# Altium PCB Main_Board.PcbDoc (part 12 of 14)
Units mm, origin at the board's own origin, x right, y up, seen from the top; angles counter-clockwise.
Board outline 142 x 82 mm, 10 copper layers (L1_Top, L2_PWR1, L3_Sig1, L4_GND1, L5_Sig2, L6_Sig3, L7_GND2, L8_Sig4, L9_GND3, L8_Bottom), stack 1.71 mm thick; 299 components, 328 nets, 2329 pads, 2908 vias.
Unrouted connection lines stored in the file: 2.
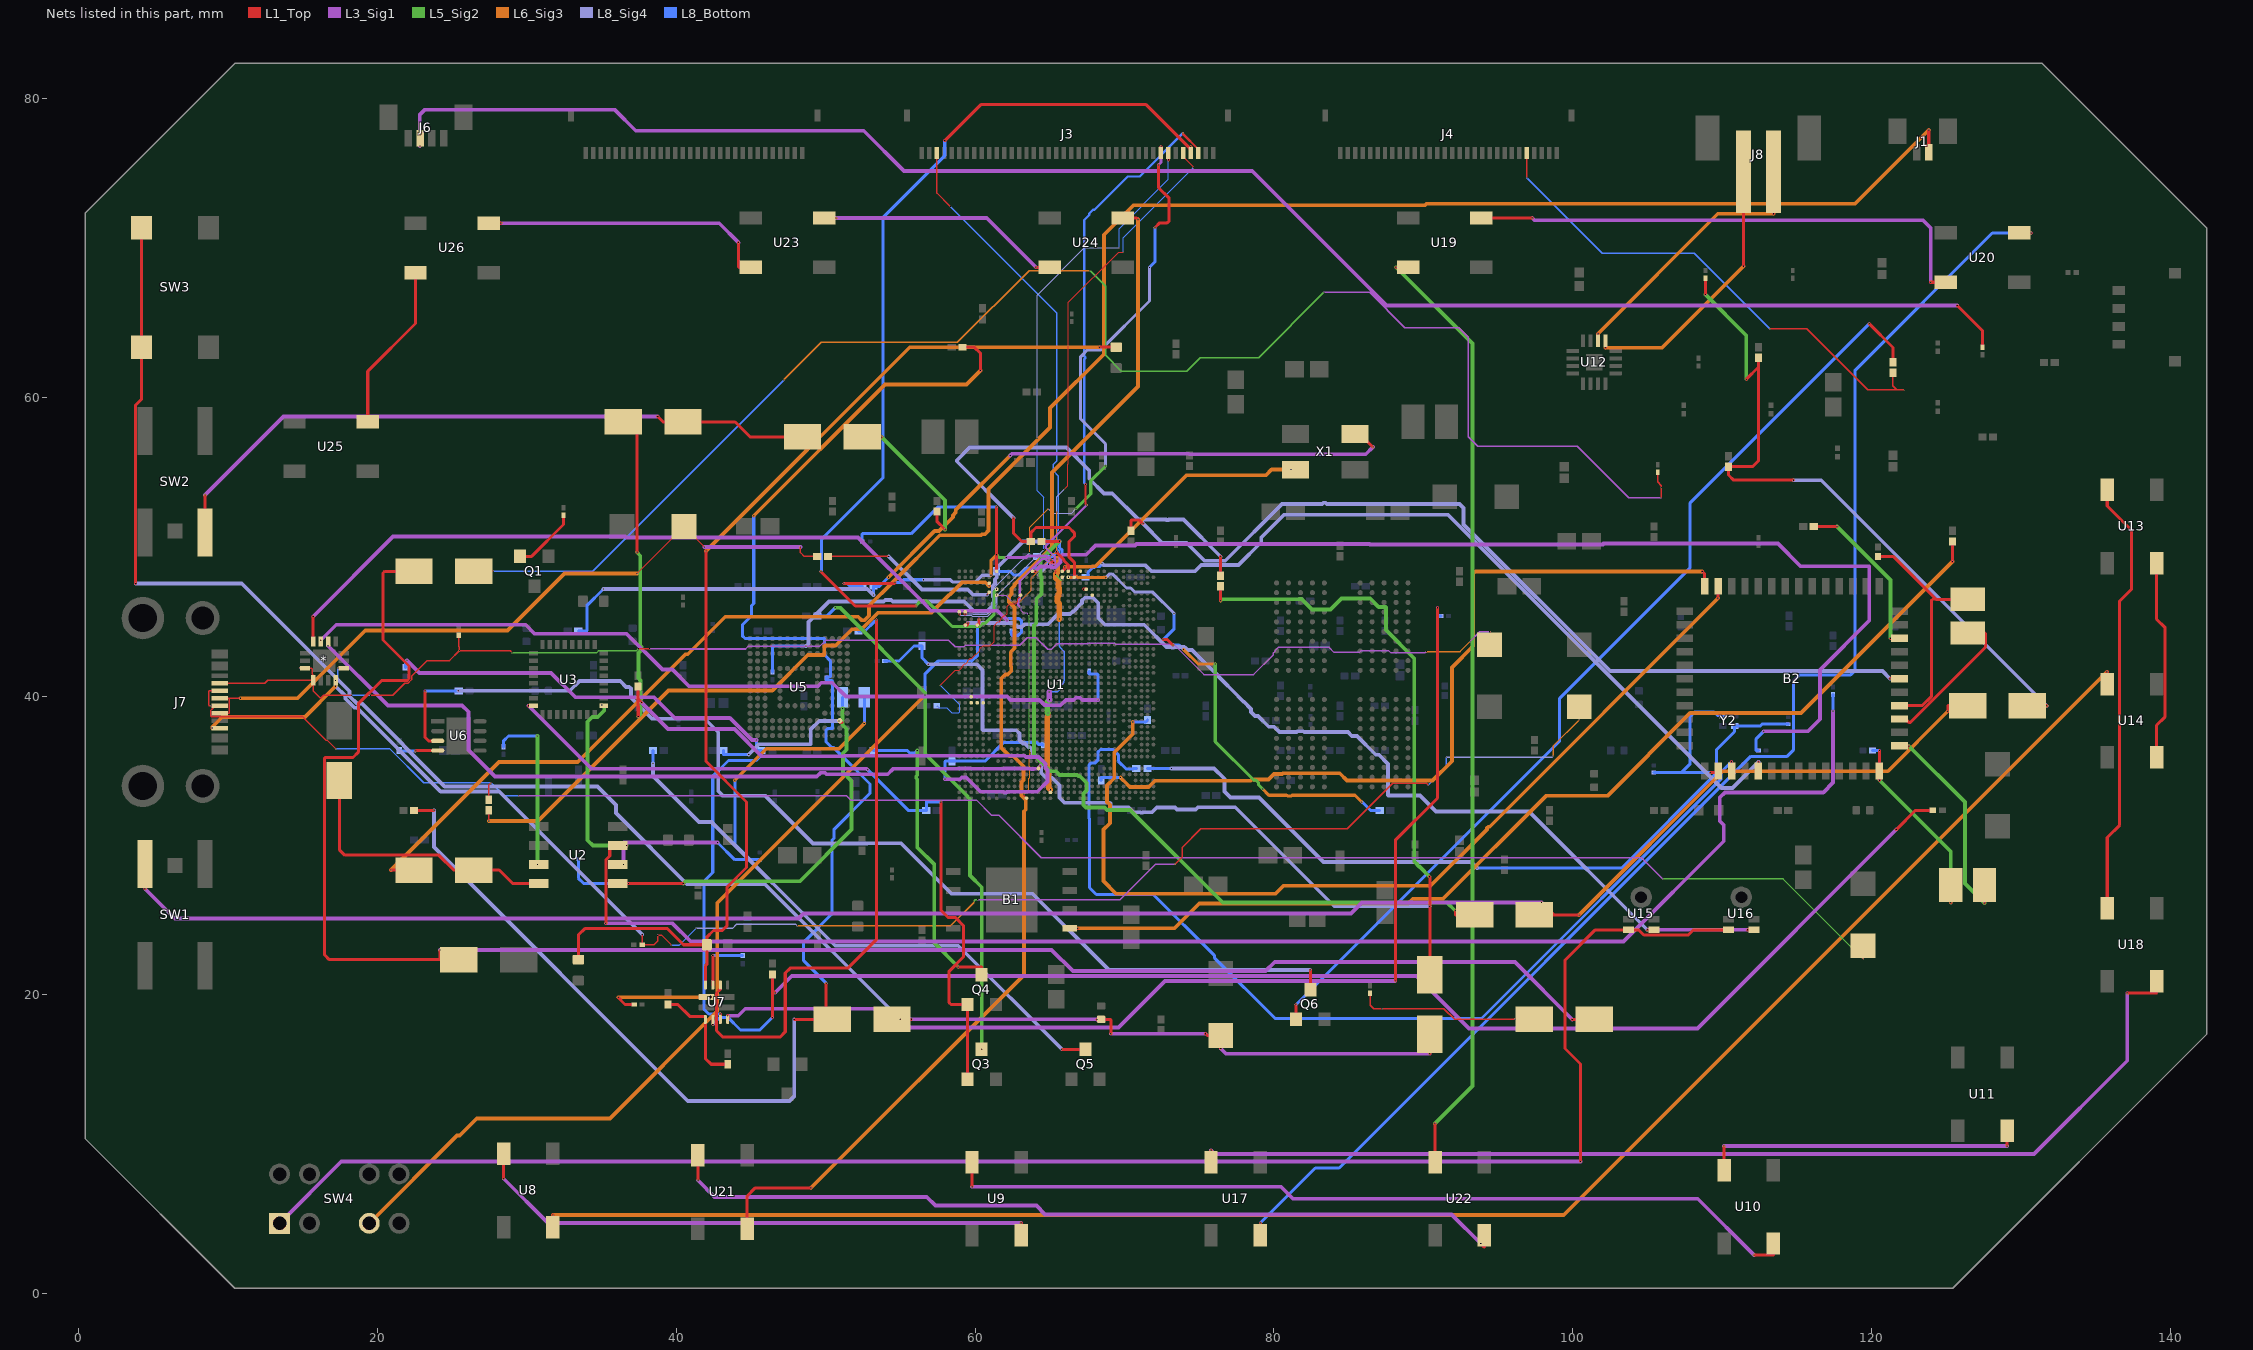
[diagram p19: the nets of this part, all layers, seen from the top]

## Via types
v1: diameter 0.1, hole 0.08, L1_Top to L8_Bottom, 1169 vias
v2: diameter 0.01, hole 0.01, L3_Sig1 to L8_Sig4, 433 vias
v3: diameter 0.01, hole 0.01, L8_Sig4 to L8_Bottom, 375 vias
v4: diameter 0.01, hole 0.01, L1_Top to L3_Sig1, 355 vias
v5: diameter 0.254, hole 0.01, L1_Top to L8_Bottom, 150 vias
v6: diameter 0.01, hole 0.01, L6_Sig3 to L8_Bottom, 129 vias
v7: diameter 0.05, hole 0.04, L1_Top to L8_Bottom, 104 vias
v8: diameter 0.01, hole 0.01, L1_Top to L5_Sig2, 89 vias
v9: diameter 0.01, hole 0.01, L1_Top to L8_Bottom, 41 vias
v10: diameter 0.1, hole 0.08, L1_Top to L3_Sig1, 17 vias
v11: diameter 0.1, hole 0.08, L1_Top to L5_Sig2, 11 vias
v12: diameter 0.1, hole 0.08, L8_Sig4 to L8_Bottom, 10 vias
v13: diameter 0.1, hole 0.08, L6_Sig3 to L8_Bottom, 9 vias
v14: diameter 1.27, hole 0.711, L1_Top to L8_Bottom, 8 vias
v15: diameter 0.4, hole 0.2, L1_Top to L8_Bottom, 4 vias
v16: diameter 0.05, hole 0.08, L1_Top to L8_Bottom, 3 vias
v17: diameter 0.05, hole 0.08, L6_Sig3 to L8_Bottom, 1 vias

## Nets (pads, with @x,y where several pads share a name; then routed paths per layer and width w, separated by ;. In a path a pad name is that pad's centre, name@x,y a point inside that pad or via, vN(x,y) a via of type N, cw(c..) or ccw(c..) an arc to the next point about the centre after c; other vN are vias at no path point) (continued)
MIPI_DSI_D3P: J3.3 U1.AT18 | length 47.8
  L1_Top w0.102: J3.3@57.441,76.349 57.441,73.668 v4(58.344,72.765) ; U1.AT18@65.041,33.549 v1(65.041,33.724)
  L3_Sig1 w0.381: v3(64.967,40.275) 64.967,39.77 v8(64.987,39.75)
  L5_Sig2 w0.381: v2(64.869,38.864) 64.84,38.894 64.84,39.603 v8(64.987,39.75)
  L6_Sig3 w0.381: v2(64.869,38.864) 64.869,38.602 64.826,38.558 64.826,36.564 64.834,36.556 64.834,35.078 64.931,34.981 64.931,33.834 v1(65.041,33.724) ; v6(65.491,49.168) 65.509,49.149 65.509,48.262 65.417,48.169 65.417,47.879 65.581,47.715 65.581,47.699 65.607,47.673 65.607,47.508 65.581,47.482 65.581,47.266 65.626,47.221 65.626,46.868 65.581,46.823 65.581,46.703 65.511,46.632 65.511,46.33 65.641,46.199 v6(65.641,45.149)
  L8_Bottom w0.102: v4(58.344,72.765) 65.482,65.627 65.482,55.745 65.248,55.511 65.248,55.061 65.558,54.751 65.558,51.09 65.482,51.014 65.482,49.877 65.631,49.728 65.631,49.585 65.595,49.548 65.595,49.272 v6(65.491,49.168) ; v3(64.967,40.275) 65.511,40.275 65.721,40.484 65.721,40.679 65.943,40.902 65.943,41.002 65.956,41.015 65.956,42.989 65.682,43.263 65.682,43.324 65.641,43.365 v6(65.641,45.149)
  other v2: 64.967,40.275 58.344,72.765
  other v3: 58.344,72.765
Net*_6: *.6 R77.1 | length 57.7
  L1_Top w0.203: *.6@16.191,43.649 v10(16.191,43.731)
  L3_Sig1 w0.254: v10(16.191,43.731) 17.233,44.772 29.917,44.772 30.527,44.163 36.685,44.163 39.078,41.77 39.733,41.77 40.846,40.657 49.475,40.657 49.704,40.886 50.44,40.886 51.355,39.972 62.15,39.972 62.378,39.743 64.301,39.743 64.654,39.391 64.739,39.391 64.749,39.38 65.095,39.38 65.102,39.387 65.725,39.387 66.082,39.743 66.607,39.743 66.75,39.887 67.03,39.887 67.174,39.743 v1(68.22,39.743)
  L8_Bottom w0.203: R77.1@67.641,41.649 67.641,41.47 68.195,41.47 68.22,41.445 v1(68.22,39.743)
Net*_7: *.7 R78.1 | length 55.5
  L1_Top w0.203: *.7@15.691,43.649 v10(15.691,45.331)
  L3_Sig1 w0.254: v10(15.691,45.331) 21.032,50.671 36.571,50.671 36.629,50.613 52.169,50.613 56.458,46.323 56.504,46.323 56.593,46.234 56.593,46.188 57.07,45.712 61.51,45.712 62.128,45.094 v1(62.138,45.094)
  L8_Bottom w0.203: v1(62.138,45.094) 62.223,45.179 62.947,45.179 63.116,45.009 63.116,44.283 62.894,44.061 62.467,44.061 62.441,44.086 R78.1@62.441,44.349
NetB2_13: B2.13 C126.1 Y2.1 | length 12.7
  L1_Top w0.203: v1(109.216,34.866) 109.741,34.866 B2.13@109.741,34.973
  L8_Bottom w0.203: v1(109.216,34.866) 109.19,34.892 107.311,34.892 ; Y2.1@110.041,38.699 109.701,38.699 109.47,38.93 108.174,38.93 107.844,38.6 107.844,35.425 107.311,34.892 ; 107.311,34.892 105.441,34.892 C126.1@105.441,34.874 107.293,34.874 107.311,34.892
NetB2_14: B2.14 R54.2 | length 67.7
  L1_Top w0.203: v1(110.638,35.603) 110.638,35.581 110.641,35.577 B2.14@110.641,34.973
  L8_Bottom w0.203: R54.2@70.791,35.149 70.557,35.149 70.557,35.12 70.112,35.12 69.592,35.641 69.592,36.06 69.236,36.416 68.391,36.416 68.221,36.245 68.221,35.697 68.05,35.527 67.78,35.527 67.615,35.361 67.615,31.831 67.661,31.785 67.661,27.17 68.113,26.719 71.934,26.719 76.012,22.64 76.012,22.486 80.091,18.407 93.899,18.407 109.92,34.428 109.92,34.884 v1(110.638,35.603)
NetB2_16: B2.16 R56.2 | length 56.4
  L1_Top w0.203: B2.16@112.441,34.973 v1(112.441,35.577)
  L8_Sig4 w0.254: v12(68.498,48.862) 68.509,48.862 68.624,48.747 71.409,48.747 71.802,48.354 74.72,48.354 75.144,48.779 77.637,48.779 79.156,50.299 79.156,50.619 80.676,52.138 91.664,52.138 109.965,33.837 110.701,33.837 v1(112.441,35.577)
  L8_Bottom w0.203: R56.2@67.391,47.949 67.441,47.949 67.565,48.073 67.565,48.276 67.886,48.598 67.982,48.598 68.068,48.684 68.347,48.684 68.498,48.834 v12(68.498,48.862)
NetB2_25: B2.25 C130.1 L4.1 | length 13.8
  L1_Top w0.203: v1(120.541,34.361) B2.25@120.541,34.973 v1(120.541,36.349) ; L4.1@125.316,27.349 125.316,26.158 v11(125.319,26.154)
  L5_Sig2 w0.254: v1(120.541,34.361) 125.319,29.583 v11(125.319,26.154)
  L8_Bottom w0.203: C130.1@120.068,36.349 v1(120.541,36.349)
NetB2_26: B2.26 L4.2 | length 14.4
  L1_Top w0.203: B2.26@121.879,36.661 v1(122.5,36.661) ; v1(127.567,26.146) L4.2@127.567,27.349
  L5_Sig2 w0.254: v1(122.5,36.661) 126.259,32.902 126.259,27.454 v1(127.567,26.146)
NetB2_28: B2.28 L5.2 | length 10.1
  L1_Top w0.203: B2.28@121.879,38.461 122.297,38.461 122.539,38.219 122.59,38.219 127.645,43.274 127.645,44.188 127.609,44.224 L5.2@126.441,44.224
NetB2_29: B2.29 C138.1 L5.1 | length 16.3
  L1_Top w0.203: C138.1@120.441,49.349 121.459,49.349 124.308,46.499 ; B2.29@121.879,39.361 123.414,39.361 124.011,39.958 124.011,46.38 124.13,46.499 124.308,46.499 ; L5.1@126.441,46.475 124.353,46.475 124.333,46.475 124.308,46.499
NetB2_31: B2.31 R72.2 | length 60.4
  L1_Top w0.203: R72.2@70.441,51.058 70.441,51.757 70.467,51.783 70.989,51.783 v1(71.232,51.54) ; v1(121.255,41.161) B2.31@121.879,41.161
  L8_Sig4 w0.254: v1(71.232,51.54) 72.513,50.259 74.152,50.259 75.358,49.053 76.743,49.053 80.547,52.857 83.244,52.857 83.328,52.941 83.454,52.941 83.538,52.857 92.431,52.857 92.706,52.583 92.706,51.484 102.517,41.673 120.743,41.673 v1(121.255,41.161)
NetB2_34: B2.34 C132.1 | length 11.1
  L1_Top w0.203: C132.1@116.15,51.349 v1(117.699,51.349) ; v1(121.281,43.861) B2.34@121.879,43.861
  L5_Sig2 w0.254: v1(117.699,51.349) 121.281,47.768 v1(121.281,43.861)
NetB2_49: B2.49 R53.1 | length 63.2
  L1_Top w0.203: v1(109.741,46.542) B2.49@109.741,47.349
  L6_Sig3 w0.254: v13(70.557,38.26) 70.557,37.457 69.318,36.218 69.318,34.491 68.83,34.003 68.83,32.91 69.025,32.715 69.025,31.487 68.595,31.057 68.595,27.608 69.439,26.764 80.107,26.764 80.641,27.297 90.496,27.297 94.269,31.07 94.269,31.162 94.359,31.252 94.451,31.252 v1(109.741,46.542)
  L8_Bottom w0.203: v13(70.557,38.26) 71.418,38.26 71.541,38.384 R53.1@71.541,38.399
NetB2_50: B2.50 R52.1 | length 54.6
  L1_Top w0.203: v1(108.682,48.328) 108.841,48.169 B2.50@108.841,47.349
  L6_Sig3 w0.254: v13(69.744,34.536) 69.744,34.533 70.188,34.089 70.188,34.083 70.366,33.905 71.627,33.905 72.049,34.327 78.439,34.327 78.532,34.42 79.648,34.42 80.001,34.773 80.539,34.773 80.592,34.826 84.411,34.826 84.899,34.339 90.629,34.339 91.918,35.628 91.918,41.909 93.335,43.326 93.335,48.179 93.484,48.328 v1(108.682,48.328)
  L8_Bottom w0.203: R52.1@68.441,34.349 68.441,34.536 v13(69.744,34.536)
NetC9_1: C9.1 R6.1 X1.1 | length 61.7
  L1_Top w0.203: X1.1@85.441,57.549 85.746,57.549 v1(86.635,56.66)
  L3_Sig1 w0.254: v1(62.353,56.101) 62.473,56.22 74.296,56.22 74.334,56.183 86.158,56.183 v1(86.635,56.66)
  L6_Sig3 w0.254: v13(54.199,47.947) 57.293,51.041 57.588,51.041 58.517,51.97 58.517,52.092 58.699,52.274 58.699,52.447 v1(62.353,56.101)
  L8_Sig4 w0.254: v1(35.124,47.16) 52.785,47.16 v1(53.191,46.753)
  L8_Bottom w0.203: C9.1@33.441,44.349 33.981,44.349 34.006,44.375 34.006,46.042 v1(35.124,47.16) ; v1(53.191,46.753) R6.1@53.191,47.349 53.601,47.349 v13(54.199,47.947)
NetC14_1: C14.1 U2.1 Y1.2 | length 31.2
  L1_Top w0.203: U2.1@36.091,27.444 36.097,27.449 v1(36.792,27.449) ; v1@36.792,27.444 36.795,27.444 v11(40.458,27.444)
  L5_Sig2 w0.254: v11(40.458,27.444) 40.616,27.602 48.281,27.602 51.734,31.054 51.734,34.321 51.158,34.896 51.158,36.173 51.388,36.404 51.388,37.804 51.126,38.067 v1(51.126,39.159)
  L8_Bottom w0.203: C14.1@33.441,29.112 33.441,27.805 33.797,27.449 v1(36.792,27.449) ; v1(51.126,39.159) 51.132,39.165 Y1.2@51.132,39.915
NetC15_1: C15.1 U2.2 Y1.1 | length 29.2
  L1_Top w0.203: U2.2@36.091,28.714 v1(36.47,28.714)
  L3_Sig1 w0.254: v1(36.47,28.714) 36.47,30.167 36.496,30.193 v1(42.762,30.193)
  L6_Sig3 w0.254: v1(43.912,34.358) 46.021,36.466 50.88,36.466 v1(52.582,38.168)
  L8_Bottom w0.203: v1(42.762,30.193) 43.912,29.042 44.96,29.042 ; v1(43.912,34.358) 43.912,30.09 44.96,29.042 ; C15.1@45.597,29.042 44.96,29.042 ; v1(52.582,38.168) Y1.1@52.582,39.915
NetC23_1: C23.1 D3.2 R17.1 R22.1 | length 84.6
  L1_Top w0.203: R22.1@64.441,50.349 v1@65.644,50.349 ; v1(65.655,50.349) v1@65.644,50.349 ; v1(65.655,50.36) v1@65.644,50.349 ; v11(92.147,25.621) 92.147,25.375 92.172,25.349 D3.2@93.441,25.349
  L5_Sig2 w0.254: 64.421,49.173 64.377,49.129 64.377,48.028 64.438,47.967 64.438,46.836 64.096,46.494 64.096,45.982 64.116,45.962 64.116,45.836 64.096,45.816 64.096,44.869 63.944,44.717 63.944,36.06 65.045,34.96 65.409,34.96 65.655,34.714 66.844,34.714 66.913,34.645 67.006,34.645 67.453,34.198 67.453,33.681 67.255,33.483 67.255,32.694 67.42,32.529 68.678,32.529 68.83,32.377 70.379,32.377 76.577,26.179 91.588,26.179 v11(92.147,25.621) ; 64.444,49.15 v1(65.655,50.36)
  L8_Sig4 w0.254: v12(48.688,43.35) 48.84,43.502 48.84,44.95 50.213,46.323 53.887,46.323 53.991,46.427 54.381,46.427 54.485,46.323 59.271,46.323 59.952,45.642 60.76,45.642 61.188,46.07 61.188,46.234 61.264,46.31 61.264,46.576 61.188,46.652 61.188,47.386 61.324,47.522 61.324,47.81 61.445,47.932 61.445,48.237 61.324,48.358 61.324,48.457 63.216,50.349 v1(65.655,50.349)
  L8_Bottom w0.203: R17.1@46.441,41.603 46.441,43.324 46.467,43.35 v12(48.688,43.35) ; C23.1@61.441,48.349 62.342,48.349 62.591,48.101 62.996,48.101 63.466,48.57 64.494,48.57 64.998,49.074 65.295,49.074 65.373,48.995 65.562,48.995 65.767,49.201 65.767,49.477 65.804,49.514 65.804,49.799 65.655,49.948 v1(65.655,50.349)
NetC40_1: C40.1 D4.2 R26.1 R28.1 | length 47.7
  L1_Top w0.203: v1(108.897,66.87) R28.1@108.897,67.973 ; v1(111.629,61.206) 112.441,62.019 ; R26.1@112.441,62.641 112.441,62.019 ; v1(114.778,54.45) 110.784,54.45 110.441,54.792 C40.1@110.441,55.349 112.046,55.349 112.441,55.745 112.441,62.019 ; D4.2@130.441,39.349 v1(131.746,39.349)
  L5_Sig2 w0.254: v1(108.897,66.87) 111.629,64.138 v1(111.629,61.206)
  L8_Sig4 w0.254: v1(114.778,54.45) 116.645,54.45 v1(131.746,39.349)
NetC79_1: C79.1 D8.2 R35.1 R37.1 | length 69.3
  L1_Top w0.203: D8.2@36.441,58.349 37.359,58.349 v1(37.359,49.624) ; R35.1@37.441,40.641 37.441,39.788 ; v1(37.452,38.625) 37.452,39.312 37.441,39.322 37.441,39.788 ; v10(37.664,39.565) 37.441,39.788
  L3_Sig1 w0.254: v10(37.664,39.565) 39.442,37.787 43.887,37.787 45.71,35.965 51.203,35.965 51.242,36.004 63.304,36.004 63.396,35.913 64.255,35.913 64.704,35.464 64.704,35.184 64.842,35.046 64.842,34.27 64.165,33.593 62.144,33.593 62.092,33.541 61.966,33.541 61.914,33.593 60.372,33.593 59.411,34.554 59.131,34.554 59.011,34.434 v1(57.984,34.434)
  L5_Sig2 w0.254: v1(37.359,49.624) 37.588,49.395 37.588,43.37 37.665,43.293 37.665,43.084 37.467,42.886 37.467,41.186 37.604,41.049 37.604,38.777 v1(37.452,38.625)
  L8_Bottom w0.203: v1(57.984,34.434) 57.984,35.615 58.009,35.641 C79.1@58.441,35.641 60.663,35.641 61.921,36.898 62.021,36.898 62.036,36.883 63.091,36.883 63.106,36.898 64.11,36.898 64.238,36.77 64.512,36.77 64.541,36.741 R37.1@64.541,36.695
NetC121_1: C121.1 U5.C2 | length 9.9
  L1_Top w0.203: v1(50.89,38.321) 50.995,38.215 51.075,38.215 U5.C2@50.941,38.349
  L8_Sig4 w0.254: v12(44.852,36.085) 45.538,36.771 48.967,36.771 48.992,36.797 48.992,37.75 49.563,38.321 v1(50.89,38.321)
  L8_Bottom w0.203: C121.1@43.15,36.349 43.15,36.111 43.175,36.085 v12(44.852,36.085)
NetC125_1: C125.1 D10.2 R57.1 R60.1 | length 87.5
  L1_Top w0.203: v1(76.441,46.372) R60.1@76.441,47.349 ; v1(90.42,27.907) 90.441,27.885 v1(90.441,25.925) D10.2@90.441,21.349
  L5_Sig2 w0.254: v1(76.441,46.372) 76.544,46.475 81.698,46.475 81.724,46.501 81.85,46.501 82.563,45.788 83.79,45.788 84.527,46.525 86.457,46.525 87.016,45.966 87.473,45.966 87.499,45.941 87.499,44.417 89.404,42.512 89.404,28.923 89.606,28.72 89.606,28.667 89.695,28.578 89.749,28.578 v1(90.42,27.907)
  L8_Sig4 w0.254: v12(56.866,42.131) 60.118,42.131 60.499,41.75 60.499,37.736 60.524,37.711 62.755,37.711 62.978,37.489 62.978,37.059 63.215,36.821 63.323,36.821 63.576,36.568 63.697,36.568 63.786,36.479 63.786,36.358 63.879,36.265 63.879,36.157 64.436,35.601 64.436,34.83 64.738,34.528 65.155,34.528 65.655,34.028 65.655,33.19 65.985,32.86 69.008,32.86 69.058,32.809 69.058,32.685 69.187,32.556 70.285,32.556 70.626,32.215 71.057,32.215 71.087,32.185 71.213,32.185 71.243,32.215 71.844,32.215 72.165,32.536 73.382,32.536 73.519,32.399 74.756,32.399 74.913,32.556 77.414,32.556 84.044,25.925 v1(90.441,25.925)
  L8_Bottom w0.203: R57.1@53.95,42.349 54.911,42.349 55.911,43.349 C125.1@56.441,43.349 56.441,42.556 v12(56.866,42.131)
NetC127_1: C127.1 R54.1 Y2.3 | length 51.3
  L8_Sig4 w0.254: v1(73.148,35.149) 75.998,35.149 76.689,34.459 76.689,33.615 77.103,33.201 79.004,33.201 83.323,28.882 93.204,28.882 v1(93.595,28.491)
  L8_Bottom w0.203: R54.1@71.541,35.149 v1(73.148,35.149) ; v1(93.595,28.491) 103.284,28.491 109.648,34.854 109.648,36.416 110.841,37.609 Y2.3@110.841,37.999 112.569,37.999 112.681,38.112 C127.1@114.441,38.112
NetC131_1: C131.1 U7.11 | length 4
  L1_Top w0.203: U7.11@42.441,20.649 v1(42.441,22.629)
  L8_Bottom w0.203: v1(42.441,22.629) C131.1@44.441,22.629
NetC133_1: C133.1 D12.2 R64.1 R68.1 | length 108.8
  L1_Top w0.203: R64.1@22.441,32.349 v1(23.77,32.349) ; v1(47.9,18.349) D12.2@50.034,18.349 ; v1(50.034,20.769) D12.2@50.034,18.349 ; D12.2@50.441,18.349 D12.2@50.034,18.349 ; C133.1@59.15,63.349 59.952,63.349 60.372,62.93 v1(60.372,61.79)
  L6_Sig3 w0.254: v13(45.182,52.062) 53.971,60.85 59.432,60.85 v1(60.372,61.79)
  L8_Sig4 w0.254: v1(23.77,32.349) 23.77,29.888 40.763,12.895 47.57,12.895 47.9,13.225 v1(47.9,18.349)
  L8_Bottom w0.203: v13(45.182,52.062) 45.182,46.195 45.03,46.042 45.03,45.375 44.443,44.787 44.443,43.996 44.591,43.848 45.544,43.848 45.546,43.849 49.907,43.849 49.932,43.824 49.932,42.74 50.313,42.359 50.313,41.292 50.288,41.267 50.049,41.267 R68.1@50.049,41.212 50.049,41.038 50.415,41.038 50.44,41.013 50.44,37.838 50.415,37.813 50.127,37.813 50.006,37.691 50.006,37.523 50.008,37.52 50.008,36.962 50.427,36.543 50.542,36.543 52.967,34.117 52.967,33.482 50.567,31.082 50.567,30.492 50.426,30.351 50.426,25.428 48.522,23.525 48.522,22.28 v1(50.034,20.769)
NetC134_2: C134.2 C135.2 C136.2 U7.12 | length 75.6
  L1_Top w0.203: C135.2@33.441,22.349 33.441,23.995 33.873,24.427 39.406,24.427 40.483,23.349 C136.2@42.041,23.349 ; U7.12@41.941,20.649 41.941,21.938 42.041,22.038 C136.2@42.041,23.349 ; v1(41.982,49.7) 41.982,35.628 44.7,32.91 44.7,28.516 43.404,27.221 43.404,24.63 43.074,24.3 42.49,24.3 42.041,23.851 C136.2@42.041,23.349 ; v1(68.347,63.349) C134.2@69.441,63.349
  L6_Sig3 w0.254: v1(41.982,49.7) 55.631,63.349 v1(68.347,63.349)
NetC137_1: C137.1 D10.1 D12.1 D14.1 SW3.1 SW3.2 | length 127.8
  L1_Top w0.203: v1(3.806,47.541) 3.806,59.479 4.191,59.864 SW3.1@4.191,63.349 SW3.2@4.191,71.349 ; D12.1@54.441,18.349 55.742,18.349 v1(55.749,18.356) ; v10(68.164,18.349) C137.1@68.441,18.349 69.058,18.349 69.084,18.324 v1(69.084,17.391) ; v1(75.434,17.391) 75.551,17.274 D14.1@76.441,17.274 v1(76.441,16.399) ; v1(90.441,16.049) D10.1@90.441,17.349
  L3_Sig1 w0.254: v1(54.987,18.356) v1(55.749,18.356) 68.157,18.356 v10(68.164,18.349) ; v1(69.084,17.391) v1(75.434,17.391) ; v1(76.441,16.399) 76.792,16.049 v1(90.441,16.049)
  L8_Sig4 w0.254: v1(3.806,47.541) 10.902,47.541 18.119,40.324 18.119,39.988 18.618,39.489 18.954,39.489 24.491,33.952 34.718,33.952 35.956,32.714 35.956,32.16 40.717,27.399 45.944,27.399 v1(54.987,18.356)
NetD1_1: D1.1 D2.1 U2.8 | length 18.9
  L1_Top w0.203: D1.1@17.441,34.349 17.441,29.71 17.809,29.342 24.098,29.342 25.091,28.349 D2.1@26.441,28.349 28.139,28.349 29.044,27.444 U2.8@30.791,27.444
NetD2_2: D2.2 J1.1 | length 134.2
  L1_Top w0.203: v1(20.9,28.349) D2.2@22.441,28.349 ; J1.1@123.841,76.399 v1(123.841,77.894)
  L6_Sig3 w0.254: v1(20.9,28.349) 28.128,35.577 33.397,35.577 40.61,42.791 40.763,42.791 43.277,45.306 52.175,45.306 52.402,45.079 52.612,45.079 52.907,45.373 52.907,46.039 54.495,47.628 54.495,47.655 54.585,47.744 54.611,47.744 57.634,50.767 60.406,50.767 60.463,50.823 60.644,50.823 60.905,51.084 60.905,53.865 65.02,57.98 65.02,59.276 68.627,62.882 68.627,70.883 70.598,72.855 90.12,72.855 90.219,72.954 118.902,72.954 v1(123.841,77.894)
NetD3_1: D3.1 D4.1 SW1.B | length 132.6
  L1_Top w0.203: v1(4.441,27.094) SW1.B@4.441,28.749 ; D3.1@97.441,25.349 98.741,25.349 ; v10(97.913,26.179) 97.913,26.178 98.741,25.349 ; v1(100.427,25.349) 98.741,25.349 ; v1(125.116,38.981) 125.116,39.324 125.142,39.349 D4.1@126.441,39.349
  L3_Sig1 w0.254: v1(4.441,27.094) 6.422,25.113 48.18,25.113 48.511,25.444 85.163,25.444 85.899,26.179 v10(97.913,26.179)
  L6_Sig3 w0.254: v1(100.427,25.349) 110.046,34.968 121.103,34.968 v1(125.116,38.981)
NetD5_1: D5.1 D6.1 D9.1 | length 122.3
  L1_Top w0.203: D5.1@22.441,48.349 20.483,48.349 20.364,48.23 20.364,43.745 22.103,42.005 22.103,41.175 21.958,41.029 20.26,41.029 18.716,39.485 18.716,36.238 18.36,35.882 16.48,35.882 16.455,35.857 16.455,22.667 16.772,22.349 24.189,22.349 ; v10(24.177,23.004) 24.177,22.362 24.189,22.349 ; D6.1@25.441,22.349 24.189,22.349 ; v10(99.977,18.349) D9.1@101.441,18.349
  L3_Sig1 w0.254: v10(24.177,23.004) 65.121,23.004 66.544,21.582 79.447,21.582 80.057,22.192 96.135,22.192 v10(99.977,18.349)
NetD7_1: D7.1 D8.1 SW2.B | length 45.3
  L1_Top w0.203: SW2.B@8.441,50.949 v1(8.441,53.459) ; v1(38.756,58.717) 39.124,58.349 D8.1@40.441,58.349 43.938,58.349 44.938,57.349 D7.1@48.441,57.349
  L3_Sig1 w0.254: v1(8.441,53.459) 13.699,58.717 v1(38.756,58.717)
NetD7_2: D7.2 R33.1 | length 10.7
  L1_Top w0.203: D7.2@52.441,57.349 v11(53.742,57.349) ; R33.1@57.441,52.349 57.441,51.69 v1(57.984,51.148)
  L5_Sig2 w0.254: v11(53.742,57.349) 57.984,53.107 v1(57.984,51.148)
NetJ6_2: J6.2 R70.2 | length 114.6
  L1_Top w0.203: v1(22.83,76.827) 22.841,76.827 J6.2@22.841,77.349 ; v1(125.751,66.147) 127.441,64.457 R70.2@127.441,63.349
  L3_Sig1 w0.254: v1(22.83,76.827) 22.83,78.922 23.148,79.24 35.886,79.24 37.283,77.843 52.548,77.843 55.236,75.155 78.553,75.155 87.561,66.147 v1(125.751,66.147)
NetJ8_1: J8.1 U12.9 | length 18.3
  L1_Top w0.203: v1(102.191,63.314) U12.9@102.191,63.784 ; v1(111.441,68.775) J8.1@111.441,75.099
  L6_Sig3 w0.254: v1(102.191,63.314) 105.98,63.314 v1(111.441,68.775)
NetJ8_2: J8.2 U12.10 | length 18.4
  L1_Top w0.203: U12.10@101.691,63.784 v1(101.691,64.254) ; v1(113.441,72.28) J8.2@113.441,75.099
  L6_Sig3 w0.254: v1(101.691,64.254) 109.718,72.28 v1(113.441,72.28)
NetL1_2: L1.2 U1.A27 | length 14.5
  L1_Top w0.203: U1.A27@61.441,48.349 v1(61.441,52.646)
  L8_Bottom w0.203: L1.2@52.441,50.349 52.441,50.843 52.467,50.868 55.723,50.868 57.501,52.646 v1(61.441,52.646)
NetQ1_2: Q1.2 R32.1 | length 4.4
  L1_Top w0.203: Q1.2@29.541,49.349 30.313,49.349 32.441,51.478 R32.1@32.441,52.095
NetQ3_3: Q3.3 R44.2 | length 35.2
  L1_Top w0.203: Q3.3@60.441,16.349 v1(60.448,16.349)
  L5_Sig2 w0.254: v1(50.643,45.915) 50.948,45.915 56.663,40.2 56.663,36.111 59.505,33.269 59.505,33.227 59.66,33.071 59.66,27.983 60.448,27.195 v1(60.448,16.349)
  L8_Bottom w0.203: R44.2@49.441,45.349 50.077,45.349 v1(50.643,45.915)
NetQ4_3: Q4.3 R43.2 | length 20.8
  L1_Top w0.203: v11(58.873,21.861) 60.416,21.861 60.441,21.836 Q4.3@60.441,21.349
  L5_Sig2 w0.254: v1(56.13,36.349) 56.13,34.697 56.058,34.625 56.058,34.499 56.13,34.427 56.13,29.862 57.273,28.719 57.273,23.462 v11(58.873,21.861)
  L8_Bottom w0.203: R43.2@53.191,36.349 55.459,36.349 55.627,36.181 55.961,36.181 v1(56.13,36.349)
NetQ5_3: Q5.3 R47.2 | length 38.2
  L1_Top w0.203: v1(65.808,16.349) Q5.3@67.391,16.349
  L8_Sig4 w0.254: v12(38.441,35.476) 38.441,34.635 41.51,31.567 42.35,31.567 50.633,23.284 58.873,23.284 v1(65.808,16.349)
  L8_Bottom w0.203: v12(38.441,35.476) R47.2@38.441,36.349
NetQ6_1: Q6.1 R58.2 | length 65.7
  L1_Top w0.203: Q6.1@81.491,18.349 v1(81.491,19.347) ; v1(119.858,64.914) 121.441,63.331 R58.2@121.441,62.349
  L8_Bottom w0.203: v1(81.491,19.347) 99.132,36.987 99.132,39.845 107.844,48.557 107.844,52.9 v1(119.858,64.914)
NetQ6_3: Q6.3 R59.2 U6.3 | length 75.6
  L1_Top w0.203: v1(23.186,40.327) 23.186,37.228 23.415,36.999 U6.3@24.027,36.999 ; Q6.3@82.441,20.349 v1(82.441,21.658)
  L8_Sig4 w0.254: v12(25.396,40.353) 32.869,40.353 33.524,41.008 36.243,41.008 36.639,40.611 36.844,40.611 36.959,40.496 36.959,39.884 38.37,38.473 41.906,38.473 42.807,37.571 42.807,33.634 43.125,33.317 45.97,33.317 49.157,30.129 50.483,30.129 50.498,30.114 50.636,30.114 50.651,30.129 52.766,30.129 52.783,30.147 55.045,30.147 58.428,26.764 63.851,26.764 68.957,21.658 v1(82.441,21.658)
  L8_Bottom w0.203: v1(23.186,40.327) 25.37,40.327 v12(25.396,40.353) 25.396,40.349 R59.2@25.441,40.349
NetR1_1: R1.1 U1.B15 | length 32.8
  L1_Top w0.203: v4(72.591,43.77) 72.879,43.77 v3(73.242,43.406)
  L5_Sig2 w0.203: v2(76.078,42.131) 76.078,36.947 78.646,34.379 78.786,34.379 78.968,34.196 78.968,34.057 v2(79.255,33.77)
  L6_Sig3 w0.203: v9(66.241,47.949) 66.669,47.949 66.717,47.997 66.822,47.997 66.9,47.919 v6(68.749,47.919) ; v6(73.944,43.104) 73.978,43.104 74.951,42.131 v2(76.078,42.131) ; v2(79.255,33.77) 79.667,33.358 80.861,33.358 80.906,33.313 81.164,33.313 81.208,33.358 85.43,33.358 v1(85.877,32.91)
  L8_Sig4 w0.203: v6(68.749,47.919) 69.01,48.181 69.179,48.181 70.13,47.23 70.412,47.23 70.668,46.975 71.869,46.975 v3(73.326,45.518)
  L8_Bottom w0.203: v4(72.591,43.77) 72.726,43.904 73.326,44.504 v3(73.326,45.518) ; v3(73.242,43.406) 73.262,43.426 73.632,43.426 73.944,43.114 v6(73.944,43.104) ; v1(85.877,32.91) 85.908,32.91 86.47,32.349 R1.1@87.087,32.349
  other v2: 73.242,43.406 72.591,43.77
  other v3: 72.591,43.77
  other v4: 73.242,43.406
NetR4_2: R4.2 U1.A15 | length 3.1
  L1_Top w0.203: v1(65.459,49.656) 65.459,49.614 65.956,49.117 65.956,49.054 66.25,48.76 66.25,48.357 U1.A15@66.241,48.349
  L8_Bottom w0.203: R4.2@64.15,49.349 65.19,49.349 65.423,49.582 65.423,49.62 v1(65.459,49.656)
NetR6_2: R6.2 U1.B16 | length 20.6
  L1_Top w0.04: v4(64.917,48.819) 64.922,48.825 64.922,48.902 64.951,48.931 v4@65.236,48.931 ; v2(65.294,48.426) 65.389,48.331 v8(65.389,48.131) ; U1.B16@65.841,47.949 65.898,47.949 v2(65.988,48.038)
  L1_Top w0.203: v1(51.234,47.541) 54.596,47.541 v4(54.647,47.592) ; v4(65.08,49.088) v4(65.236,48.932)
  L3_Sig1 w0.203: v8(62.083,49.261) 63.392,49.261 63.495,49.365 64.804,49.365 v4(65.08,49.088)
  L5_Sig2 w0.04: v8(65.389,48.131) 65.75,47.769 v2(65.895,47.769)
  L5_Sig2 w0.203: v2(61.441,49.458) 61.638,49.261 v8(62.083,49.261)
  L6_Sig3 w0.203: v6(61.077,48.084) 61.077,49.093 v2(61.441,49.458)
  L8_Sig4 w0.04: v2(65.294,48.426) 65.297,48.423 65.342,48.423 65.36,48.44 v3(65.36,48.465) ; v2(65.895,47.769) 65.895,47.945 v2(65.988,48.038)
  L8_Sig4 w0.203: v3(56.551,47.784) 58.336,47.784 58.478,47.642 60.036,47.642 60.478,48.084 v6(61.077,48.084) ; v2(64.225,48.099) 64.931,48.805
  L8_Bottom w0.04: v4(65.236,48.932) 65.193,48.888 65.193,48.632 v3(65.36,48.465)
  L8_Bottom w0.203: v1(51.234,47.541) 51.45,47.541 51.641,47.349 R6.2@52.441,47.349 ; v4(54.647,47.592) 55.024,47.592 55.216,47.784 v3(56.551,47.784)
  other v2: 54.647,47.592 64.917,48.819 65.236,48.932
  other v3: 54.647,47.592 65.236,48.932
  other v4: 65.988,48.038 64.225,48.099 65.294,48.426
NetR55_1: R55.1 U6.4 | length 2.6
  L1_Top w0.203: v1(22.551,36.314) 22.586,36.349 U6.4@24.027,36.349
  L8_Bottom w0.203: R55.1@21.441,36.349 21.441,36.314 v1(22.551,36.314)
NetR63_2: R63.2 U7.6 | length 73.9
  L1_Top w0.203: U7.6@43.441,18.349 v10(43.441,18.597) ; v10(88.134,20.922) 88.134,30.345 90.953,33.164 v1(90.953,45.915)
  L3_Sig1 w0.254: v10(43.441,18.597) 44.141,18.597 44.611,19.067 53.234,19.067 53.963,18.339 53.963,18.291 54.439,17.815 69.61,17.815 72.716,20.922 v10(88.134,20.922)
  L8_Bottom w0.203: v1(90.953,45.915) 90.953,45.375 90.979,45.349 R63.2@91.187,45.349
NetR65_2: R65.2 R67.2 U7.5 | length 48.7
  L1_Top w0.203: U7.5@42.941,18.349 v1(42.941,18.712)
  L3_Sig1 w0.254: v1(21.967,42.385) 22.805,41.546 31.619,41.546 33.244,39.921 38.502,39.921 39.899,38.524 43.582,38.524 45.056,37.05 v1(45.36,37.05)
  L8_Bottom w0.203: R65.2@21.855,41.918 21.855,42.273 v1(21.967,42.385) ; v1(42.941,18.712) 42.172,18.712 41.855,19.029 41.855,27.602 42.439,28.186 42.439,34.625 43.495,35.681 45.347,35.681 45.691,36.025 R67.2@45.691,36.349 45.386,36.349 45.36,36.375 v1(45.36,37.05)
NetR66_1: R66.1 U7.10 | length 41.9
  L1_Top w0.203: U7.10@42.941,20.649 42.941,20.363 42.693,20.115 42.693,17.594 43.125,17.162 46.935,17.162 47.291,17.518 47.291,21.455 47.621,21.785 51.482,21.785 53.387,23.69 53.387,34.397 53.399,34.409 53.399,34.745 53.387,34.757 v1(53.387,45.082)
  L8_Bottom w0.203: R66.1@52.191,44.349 52.633,44.349 53.292,45.008 53.313,45.008 v1(53.387,45.082)
NetR69_2: R69.2 R71.2 U7.4 | length 93.8
  L1_Top w0.203: v1(42.441,18.003) U7.4@42.441,18.349 ; v1(46.441,18.488) 46.441,20.298 ; R71.2@46.441,21.349 46.441,20.298 ; v1(46.605,20.134) 46.441,20.298 ; v10(121.664,31.056) 122.957,32.349 R69.2@124.116,32.349
  L3_Sig1 w0.254: v1(46.605,20.134) 47.722,21.252 89.556,21.252 93.061,17.747 108.355,17.747 v10(121.664,31.056)
  L8_Bottom w0.203: v1(42.441,18.003) 42.927,18.488 43.442,18.488 44.293,17.637 45.59,17.637 v1(46.441,18.488)
NetR73_2: R73.2 R74.2 U7.3 | length 7.3
  L1_Top w0.203: R73.2@39.441,19.349 40.102,19.349 40.892,18.559 41.941,18.559 U7.3@41.941,18.349 41.941,15.74 42.332,15.349 R74.2@43.441,15.349
NetR79_1: R79.1 U7.1 | length 7.8
  L1_Top w0.203: v1(36.107,19.829) 36.107,19.811 36.569,19.349 R79.1@37.187,19.349 ; U7.1@42.016,19.849 v15(42.291,19.849)
  L6_Sig3 w0.254: v1(36.107,19.829) 42.272,19.829 v15(42.291,19.849)
NetSW4_1: SW4.1 U15.1 U16.1 | length 114.8
  L1_Top w0.203: v10(100.529,8.831) 100.529,15.359 99.488,16.4 99.488,22.319 101.518,24.349 U15.1@103.741,24.349 104.417,24.349 104.771,23.995 107.744,23.995 108.098,24.349 U16.1@110.441,24.349
  L3_Sig1 w0.254: SW4.1@13.441,4.699 17.573,8.831 v10(100.529,8.831)
NetU1_A16: U1.A16 X1.3 | length 18.5
  L1_Top w0.203: U1.A16@65.841,48.349 65.841,48.362 66.026,48.547 v1(66.026,48.649) ; v1(81.149,55.161) 81.149,55.149 X1.3@81.441,55.149
  L6_Sig3 w0.254: v1(66.026,48.649) 67.817,48.649 67.851,48.683 68.056,48.683 74.153,54.78 79.472,54.78 79.853,55.161 v1(81.149,55.161)
NetU8_2: U8.2 U14.4 | length 120.7
  L1_Top w0.203: U8.2@31.741,4.449 31.741,5.245 v1(31.746,5.25) ; v1(135.784,41.623) 135.791,41.615 U14.4@135.791,40.799
  L6_Sig3 w0.254: v1(31.746,5.25) 99.411,5.25 v1(135.784,41.623)
NetU8_4: U8.4 U9.2 | length 38.4
  L1_Top w0.203: v1(28.441,7.688) U8.4@28.441,9.349 ; v10(63.089,4.716) 63.091,4.714 U9.2@63.091,3.899
  L3_Sig1 w0.254: v1(28.441,7.688) 31.413,4.716 v10(63.089,4.716)
NetU9_4: U9.4 U10.2 | length 57.9
  L1_Top w0.203: v1(59.791,7.155) U9.4@59.791,8.799 ; v1(112.137,2.583) 113.429,2.583 113.441,2.595 U10.2@113.441,3.349
  L3_Sig1 w0.254: v1(59.791,7.155) 80.463,7.155 81.276,6.342 108.378,6.342 v1(112.137,2.583)
NetU10_4: U10.4 U11.2 | length 21.6
  L1_Top w0.203: U10.4@110.141,8.249 v1(110.141,9.873) ; v1(129.091,9.88) U11.2@129.091,10.899
  L3_Sig1 w0.254: v1(110.141,9.873) 129.084,9.873 v1(129.091,9.88)
NetU13_2: U13.2 U18.4 | length 29.3
  L1_Top w0.203: U18.4@135.791,25.799 135.791,30.523 136.622,31.354 136.622,46.36 137.399,47.136 137.399,51.107 135.791,52.715 U13.2@135.791,53.799
NetU13_4: U13.4 U14.2 | length 13.5
  L1_Top w0.203: U14.2@139.091,35.899 139.091,38.041 139.67,38.62 139.67,44.569 139.091,45.148 U13.4@139.091,48.899
NetU17_2: U17.2 U20.4 | length 95.2
  L1_Top w0.203: U17.2@79.091,3.899 v1(79.091,4.716) ; U20.4@129.891,70.999 v1(130.704,70.999)
  L8_Bottom w0.203: v1(79.091,4.716) 82.774,8.399 84.375,8.399 111.934,35.958 114.359,35.958 114.778,36.377 114.778,41 115.197,41.419 118.614,41.419 118.919,41.724 118.919,61.816 128.102,70.999 v1(130.704,70.999)
NetU17_4: U17.4 U18.2 | length 72.1
  L1_Top w0.203: U17.4@75.791,8.799 v1(75.791,9.593) ; v1(137.13,20.109) 139.066,20.109 139.091,20.134 U18.2@139.091,20.899
  L3_Sig1 w0.254: v1(75.791,9.593) 76.045,9.339 130.882,9.339 137.13,15.588 v1(137.13,20.109)
NetU19_2: U19.2 U22.4 | length 63.9
  L1_Top w0.203: v1(88.185,68.699) U19.2@88.991,68.699 ; U22.4@90.791,8.799 v1(90.791,11.387)
  L5_Sig2 w0.254: v1(88.185,68.699) 93.29,63.594 93.29,13.885 v1(90.791,11.387)
NetU19_4: U19.4 U20.2 | length 35
  L1_Top w0.203: U19.4@93.891,71.999 v1(97.303,71.999) ; v1(123.973,67.699) U20.2@124.991,67.699
  L3_Sig1 w0.254: v1(97.303,71.999) 97.454,71.849 123.452,71.849 123.973,71.328 v1(123.973,67.699)
NetU21_2: U21.2 U24.4 | length 83.7
  L1_Top w0.203: U21.2@44.741,4.349 44.741,6.532 45.288,7.079 v1(49.018,7.079) ; U24.4@69.891,71.999 70.813,71.999 v17(70.913,71.899)
  L6_Sig3 w0.254: v1(49.018,7.079) 63.273,21.334 63.273,32.271 63.394,32.392 63.394,33.036 63.11,33.321 63.11,33.327 63.095,33.342 63.095,33.48 63.11,33.495 63.11,34.247 63.238,34.375 63.238,35.301 62.556,35.984 62.303,35.984 61.744,36.543 61.744,41.156 62.035,41.446 62.192,41.446 62.419,41.673 62.419,41.954 62.382,41.991 62.382,42.936 62.638,43.193 62.638,45.918 62.4,46.156 62.396,46.156 62.273,46.28 62.273,46.648 62.438,46.814 62.438,47.182 62.641,47.385 62.641,47.465 65.147,49.97 65.147,54.958 70.913,60.723 v17(70.913,71.899)
NetU21_4: U21.4 U22.2 | length 57
  L1_Top w0.203: v1(41.441,7.587) U21.4@41.441,9.249 ; v1(93.849,3.345) 94.091,3.102 U22.2@94.091,3.899
  L3_Sig1 w0.254: v1(41.441,7.587) 42.559,6.469 56.765,6.469 57.349,5.885 64.105,5.885 64.69,5.301 91.893,5.301 v1(93.849,3.345)
NetU23_2: U23.2 U26.4 | length 19.7
  L1_Top w0.203: U26.4@27.441,71.649 28.266,71.649 v1(28.27,71.645) ; v1(44.166,70.35) 44.166,68.725 44.192,68.699 U23.2@44.991,68.699
  L3_Sig1 w0.254: v1(28.27,71.645) 42.871,71.645 v1(44.166,70.35)
NetU23_4: U23.4 U24.2 | length 16.5
  L1_Top w0.203: U23.4@49.891,71.999 50.694,71.999 v1(50.696,72.001) ; v1(64.08,68.699) U24.2@64.991,68.699
  L3_Sig1 w0.254: v1(50.696,72.001) 60.778,72.001 v1(64.08,68.699)
NetU25_4: U25.4 U26.2 | length 11.3
  L1_Top w0.203: U25.4@19.341,58.349 19.341,61.739 22.541,64.939 U26.2@22.541,68.349
PANEL_B_PWR: J3.38 U1.AU22 | length 53.7
  L1_Top w0.04: v9(63.262,33.411) 63.262,33.343 63.441,33.163 U1.AU22@63.441,33.149
  L1_Top w0.152: v3(67.397,54.171) 67.397,52.866 v4(67.474,52.789) ; v3(73.92,77.682) 73.92,77.621 74.941,76.599 J3.38@74.941,76.349
  L3_Sig1 w0.04: v2(63.033,45.954) 63.08,45.907 63.08,45.713 63.21,45.583 63.444,45.583 v8(63.574,45.453)
  L3_Sig1 w0.152: v2(63.033,45.954) 62.895,46.092 62.895,46.395 62.996,46.496 62.996,47.677 64.487,49.167 64.715,49.167 64.991,48.891 65.135,48.891 65.194,48.831 65.278,48.831 65.338,48.89 65.338,49.317 64.733,49.922 64.733,50.048 v4(67.474,52.789)
  L5_Sig2 w0.04: v8(63.574,45.453) 63.634,45.393 v2(63.634,36.416)
  L6_Sig3 w0.04: v9(63.262,33.411) 63.606,33.756 63.606,34.489 63.645,34.528 63.645,35.271 63.609,35.306 63.609,36.049 63.679,36.119 63.679,36.372 v2(63.634,36.416)
  L8_Bottom w0.152: v3(67.397,54.171) 67.313,54.255 67.313,62.538 67.366,62.592 67.366,62.676 67.313,62.73 67.313,71.873 67.649,72.209 67.649,72.294 67.901,72.546 67.986,72.546 70.217,74.778 71.016,74.778 v3(73.92,77.682)
  other v2: 67.397,54.171 73.92,77.682
  other v3: 63.033,45.954
  other v4: 67.397,54.171 73.92,77.682
PDM_DCLK: U1.J32 U15.3 U16.3 | length 65.6
  L1_Top w0.203: U1.J32@59.341,44.749 59.47,44.749 59.483,44.762 59.483,44.869 v1(59.51,44.897) ; v1(104.999,24.349) v1@105.001,24.349 ; v1(104.999,24.351) v1@105.001,24.349 ; U15.3@105.441,24.349 v1@105.001,24.349 ; v1(111.705,24.351) 111.706,24.349 U16.3@112.141,24.349
  L3_Sig1 w0.254: v1(104.999,24.351) v1(111.705,24.351)
  L8_Sig4 w0.254: v1(59.51,44.897) 62.572,44.897 62.842,44.627 62.92,44.627 62.923,44.623 63.125,44.623 63.3,44.798 64.867,44.798 65.561,45.491 66.369,45.491 66.546,45.667 66.607,45.667 66.762,45.822 66.762,45.828 66.945,46.012 66.945,46.024 67.151,46.23 67.151,46.386 67.34,46.576 67.894,46.576 68.239,46.23 68.239,45.219 68.686,44.772 71.319,44.772 72.814,43.278 73.156,43.278 73.179,43.254 73.305,43.254 73.329,43.278 73.977,43.278 74.017,43.238 74.059,43.238 74.217,43.079 74.527,43.079 75.974,41.632 76.003,41.632 76.291,41.345 76.291,41.315 77.619,39.988 77.619,39.96 77.965,39.614 77.993,39.614 78.465,39.142 78.465,38.938 78.741,38.662 78.944,38.662 79.661,37.945 80.01,37.945 80.372,37.584 81.53,37.584 81.585,37.639 81.975,37.639 82.03,37.584 84.959,37.584 85.213,37.33 85.562,37.33 86.827,36.065 87.042,36.065 87.651,35.455 87.651,33.368 87.677,33.342 89.785,33.342 90.852,32.275 97.073,32.275 v1(104.999,24.349)
PDM_DIN3: SW4.3 U1.J30 | length 64.5
  L1_Top w0.203: U1.J30@60.141,44.749 60.27,44.878 v1(60.27,45.153)
  L6_Sig3 w0.254: SW4.3@19.441,4.699 25.326,10.584 25.497,10.584 26.64,11.727 35.556,11.727 42.744,18.915 42.744,26.154 v13(56.638,40.048)
  L8_Bottom w0.203: v13(56.638,40.048) 56.638,41.457 57.539,42.359 59.8,42.359 60.168,42.727 60.168,44.62 60.27,44.721 v1(60.27,45.153)
POR_OUT: R3.1 U1.E23 | length 13.2
  L1_Top w0.05: v4(57.662,40.711) 58.67,41.719 58.952,41.719 59.156,41.924 59.156,42.005 59.301,42.149 59.382,42.149 59.511,42.279 59.511,42.36 59.671,42.519 59.792,42.519 60.311,43.039 60.311,43.16 60.531,43.379 61.012,43.379 61.269,43.637 61.269,44.718 61.527,44.975 61.608,44.975 61.763,45.13 61.763,45.211 61.914,45.362 61.995,45.362 62.138,45.505 62.138,45.993 62.324,46.179 62.712,46.179 62.857,46.325 62.857,46.511 63.041,46.695 U1.E23@63.041,46.749
  L8_Bottom w0.05: R3.1@57.441,39.349 57.591,39.199 58.112,39.199 58.425,38.886 58.895,38.886 58.959,38.95 58.959,39.415 v4(57.662,40.711)
  other v2: 57.662,40.711
  other v3: 57.662,40.711
PWR_EN: J4.26 R58.1 | length 34
  L1_Top w0.1: v1(96.941,74.693) J4.26@96.941,76.349 ; v4(113.212,64.581) 115.665,64.581 119.742,60.504 v1(122.195,60.504) ; R58.1@121.441,61.641 121.441,60.754 121.692,60.504
  L8_Bottom w0.1: v1(96.941,74.693) 101.998,69.637 108.156,69.637 v4(113.212,64.581)
  other v2: 113.212,64.581
  other v3: 113.212,64.581
PWR_HOLD: D5.2 R30.1 | length 106.9
  L1_Top w0.1: D5.2@26.441,48.349 v1(27.741,48.349) ; R30.1@105.7,54.973 105.7,54.331 105.939,54.091 v1(105.939,53.936) 105.939,53.293 v4(105.897,53.251)
  L3_Sig1 w0.1: v8(83.347,67.023) 86.407,67.023 88.776,64.654 92.362,64.654 93.01,64.005 93.01,57.364 93.658,56.716 100.299,56.716 103.743,53.272 105.918,53.272
  L5_Sig2 w0.1: v2(67.694,68.475) 68.742,67.427 68.742,62.8 69.79,61.752 74.159,61.752 75.067,62.66 78.984,62.66 v8(83.347,67.023)
  L6_Sig3 w0.1: v6(47.19,61.16) 49.707,63.677 58.811,63.677 63.609,68.475 v2(67.694,68.475)
  L8_Bottom w0.1: v1(27.741,48.349) 34.411,48.349 47.19,61.128 v6(47.19,61.16)
  other v2: 105.897,53.251
  other v3: 105.897,53.251
PWR_HOLD_EXT: D9.2 R38.1 | length 12.2
  L1_Top w0.1: R38.1@86.441,20.095 86.441,19.308 86.692,19.058 v1(87.245,19.058) 91.389,19.058 92.097,18.349 D9.2@97.441,18.349
  other v1: 96.141,18.349
RGMII_CRS_DV: U1.AA31
RGMII_MDC: U1.AB30
RGMII_MDIO: U1.AB29
RGMII_RXCLK: U1.AB31
RTC_CLK: R15.2 U2.7 | length 11.5
  L1_Top w0.203: v1(30.704,28.714) U2.7@30.791,28.714
  L5_Sig2 w0.254: v1(30.704,28.714) v1(30.704,37.33)
  L8_Bottom w0.203: R15.2@28.441,36.604 28.441,37.012 28.759,37.33 v1(30.704,37.33)
RTC_INT: R14.1 U2.3 U3.17 | length 114.1
  L1_Top w0.203: v1(35.01,39.399) 35.01,39.398 35.058,39.349 U3.17@35.141,39.349 ; v1(35.276,24.782) 35.276,29.021 35.543,29.288 35.543,29.786 35.741,29.984 36.673,29.984 v11(36.673,29.989)
  L3_Sig1 w0.254: v1(35.276,24.782) 39.747,24.782 40.966,23.563 103.399,23.563 110.117,30.281 110.117,31.374 109.851,31.64 109.851,33.202 110.194,33.545 116.785,33.545 117.441,34.202 v1(117.441,38.981)
  L5_Sig2 w0.254: v1(35.01,39.399) 35.17,39.239 35.17,39.028 34.742,38.6 34.375,38.6 34.057,38.282 34.057,30.345 34.413,29.989 v11(36.673,29.989)
  L8_Bottom w0.203: v1(117.441,38.981) R14.1@117.441,40.095
SDIO_CLK: R5.2 U1.A21 | length 75.1
  L1_Top w0.203: U1.A21@63.841,48.349 v10(64.029,48.349)
  L3_Sig1 w0.254: v10(64.029,48.349) 64.347,48.667 65.042,48.667 65.102,48.608 65.371,48.608 65.713,48.95 65.713,49.313 65.861,49.462 67.442,49.462 68.059,50.08 70.719,50.08 70.81,50.171 86.409,50.171 86.427,50.152 102.026,50.152 102.075,50.201 113.744,50.201 115.261,48.684 119.833,48.684 119.858,48.658 119.858,45.052 116.556,41.75 116.556,38.448 115.744,37.635 v1(112.797,37.635)
  L8_Bottom w0.203: R5.2@112.441,36.349 112.264,36.349 112.264,37.101 v1(112.797,37.635)
SDPWR_EN: U1.A13 | length 0.1
  L1_Top w0.1: v1(66.998,48.236) 67.013,48.25 67.013,48.32 U1.A13@67.041,48.349
SOC_PWR_KEY: R22.2 R60.2 U1.B14 | length 37.6
  L1_Top w0.203: v1(62.564,51.927) 62.558,51.921 62.558,50.919 63.127,50.349 R22.2@63.733,50.349 63.733,50.927 64.08,51.275 66.29,51.275 66.641,50.923 66.641,50.677 66.275,50.31 66.275,49.319 66.641,48.953 U1.B14@66.641,47.949 ; R60.2@76.441,48.058 v1(76.441,49.327)
  L8_Sig4 w0.254: v1(62.564,51.927) 62.531,51.96 58.771,55.72 58.771,55.77 59.635,56.634 66.111,56.634 67.644,55.1 67.644,54.545 68.624,53.566 69.179,53.566 70.931,51.814 72.783,51.814 72.813,51.783 72.939,51.783 72.969,51.814 73.955,51.814 v1(76.441,49.327)
SPDIF_OUT: U1.E11
SPIF_CS: B1.1 R41.1 | length 70.6
  L1_Top w0.203: B1.1@66.341,24.444 66.866,24.444 v1(66.874,24.452) ; v1(125.441,49.014) R41.1@125.441,50.349
  L6_Sig3 w0.254: v1(66.874,24.452) 73.351,24.452 75.002,26.103 88.972,26.103 89.302,26.433 91.334,26.433 98.218,33.317 102.332,33.317 107.87,38.854 115.281,38.854 v1(125.441,49.014)
SPINOR_EN: Q3.1 Q4.1 R46.1 U3.8 | length 52.4
  L1_Top w0.203: v10(30.095,39.349) U3.8@30.441,39.349 ; v1(57.705,32.91) 57.705,25.679 58.223,25.161 58.697,25.161 59.215,24.643 59.215,22.531 58.264,21.58 58.264,19.468 58.383,19.349 Q4.1@59.491,19.349 Q3.1@59.491,14.349
  L3_Sig1 w0.254: v10(30.095,39.349) 34.313,35.131 52.739,35.131 v1(52.81,35.059)
  L8_Bottom w0.203: v1(52.81,35.059) 55.52,32.349 R46.1@56.733,32.349 56.733,32.885 56.758,32.91 v1(57.705,32.91)
SYS_LED: U1.D12 | length 0.2
  L1_Top w0.203: v1(67.266,47.149) U1.D12@67.441,47.149
TP_I2CM_D_SCL: J3.34 U1.G33 | length 39.9
  L1_Top w0.203: v1(58.941,45.499) U1.G33@58.941,45.649 ; v1(72.941,75.899) J3.34@72.941,76.349
  L8_Sig4 w0.04: v1(58.941,45.499) 58.958,45.499 59.048,45.409 59.749,45.409 59.824,45.333 60.864,45.333 61.415,45.884 61.415,46.061 61.491,46.137 61.491,46.669 ; 61.491,46.669 61.491,46.751 63.346,48.606 63.398,48.606 v3(64.593,49.801) ; v3(64.152,57.255) 64.152,66.821 67.324,69.993 v3(69.652,69.993)
  L8_Bottom w0.04: v3(64.152,57.255) 64.152,53.749 64.593,53.307 v3(64.593,49.801) ; v3(69.652,69.993) 69.652,71.293 72.941,74.583 v1(72.941,75.899)
TP_I2CM_D_SDA: J3.33 U1.G32 | length 42.4
  L1_Top w0.203: v1(59.341,45.499) U1.G32@59.341,45.649 ; v4(72.041,71.36) 72.354,71.673 72.857,71.673 72.988,71.804 72.988,73.328 72.281,74.035 v4(72.281,75.559) ; J3.33@72.441,76.349 v1(72.441,76.799)
  L3_Sig1 w0.203: v4(72.281,75.559) 72.441,75.719 v1(72.441,76.799)
  L5_Sig2 w0.203: v8(66.753,52.538) 67.743,53.528 67.743,54.401 v2(68.732,55.391)
  L6_Sig3 w0.04: v6(63.646,49.606) 63.646,51.304 v6(64.889,52.547)
  L8_Sig4 w0.04: v1(59.341,45.499) 59.859,45.499 59.883,45.475 60.829,45.475 61.355,46.001 61.355,46.165 61.431,46.241 61.431,46.645 61.355,46.721 61.355,47.317 62.646,48.608 62.648,48.608 v6(63.646,49.606) ; v6(64.889,52.547) 65.19,52.246 66.461,52.246 v8(66.753,52.538)
  L8_Sig4 w0.203: v2(68.732,55.391) 68.732,56.885 67.067,58.55 67.067,62.716 67.529,63.178 68.418,63.178 71.678,66.438 v3(71.678,68.699)
  L8_Bottom w0.203: v3(71.678,68.699) 72.041,69.062 v4(72.041,71.36)
  other v2: 66.753,52.538 72.041,71.36
  other v3: 72.041,71.36
TP_INT: J3.36 U1.E27 | length 37.2
  L1_Top w0.04: v4(65.982,53.848) 66.2,54.066 66.2,55.504 66.23,55.534 66.23,66.345 69.603,69.718 v3(69.922,69.718) ; J3.36@73.941,76.349 73.941,76.099 74.602,75.439 v4(74.602,75.361)
  L3_Sig1 w0.04: v4(61.441,46.749) 62.04,46.749 v2(62.44,46.349)
  L6_Sig3 w0.04: v2(62.44,46.349) 62.465,46.323 62.991,46.323 63.751,47.084 63.751,47.887 64.943,49.079 64.943,49.167 65.043,49.266 65.043,49.372 65.139,49.469 65.158,49.469 65.233,49.544 65.474,49.544 65.549,49.619 65.549,49.694 65.482,49.76 v6(65.482,52.306)
  L8_Sig4 w0.04: v6(65.482,52.306) 65.482,53.349 v4(65.982,53.848)
  L8_Bottom w0.04: v3(69.922,69.718) 69.922,70.681 v4(74.602,75.361)
  other v2: 65.982,53.848 69.922,69.718 74.602,75.361
  other v3: 74.602,75.361
  other v4: 69.922,69.718
TP_RST: J3.37 U1.D27 | length 67.2
  L1_Top w0.203: v3(49.676,48.334) 51.986,46.024 v8(56.034,46.024) ; v4(57.97,77.176) 60.384,79.59 71.45,79.59 74.441,76.599 J3.37@74.441,76.349 v1(74.441,76.799)
  L5_Sig2 w0.203: v8(56.034,46.024) 56.197,46.187 56.197,46.206 56.359,46.369 56.759,46.369 58.48,44.649 60.328,44.649 60.542,44.863 60.673,44.863 61.274,45.464 61.274,46.982 v8(61.441,47.149)
  L8_Bottom w0.203: v3(49.676,48.334) 49.731,48.389 49.731,50.512 53.85,54.631 53.85,72.051 57.97,76.171 v4(57.97,77.176)
  other v2: 49.676,48.334 57.97,77.176
  other v3: 57.97,77.176
  other v4: 49.676,48.334
TYPEC_CC1: *.10 *.11 C140.1 D15.2 J7.A5 | length 94.9
  L1_Top w0.102: J7.A5@9.441,40.849 12.442,40.849 12.642,41.049 *.11@15.691,41.049 ; v1(14.741,41.849) *.10@15.141,41.849 15.591,41.849 15.617,41.824 15.617,41.47 15.691,41.396 *.11@15.691,41.049 ; v3(18.271,40.051) 16.386,40.051 16.231,39.896 16.131,39.896 15.691,40.336 *.11@15.691,41.049 ; v4(19.525,40.051) 21.01,40.051 21.816,40.857 22.029,40.857 22.276,41.104 22.276,41.317 23.332,42.373 24.816,42.373 v1(25.472,43.028) ; C140.1@25.441,44.069 25.441,43.319 25.472,43.289 v1(25.472,43.028) ; v8(28.996,42.911) 28.879,43.028 v1(25.472,43.028) ; v8(37.467,43.166) 38.205,43.166 v4(38.214,43.175) ; D15.2@94.441,43.424 v1(94.441,44.299)
  L3_Sig1 w0.102: v4(38.214,43.175) 39.576,43.175 39.604,43.147 44.632,43.147 44.807,43.322 49.585,43.322 49.983,43.72 58.24,43.72 58.668,43.292 59.252,43.292 59.355,43.395 62.991,43.395 63.499,43.903 64.083,43.903 64.859,43.127 65.124,43.127 65.504,43.507 67.527,43.507 67.545,43.525 69.012,43.525 69.014,43.524 69.362,43.524 69.414,43.472 73.177,43.472 73.187,43.482 73.274,43.482 75.324,41.432 78.644,41.432 79.976,42.765 79.976,42.886 80.083,42.993 80.083,43.034 80.321,43.272 83.68,43.272 84.033,42.919 85.73,42.919 85.83,43.019 87.708,43.019 87.815,42.912 90.146,42.912 v2(90.211,42.977) ; v2(93.138,43.649) 93.788,44.299 v1(94.441,44.299)
  L5_Sig2 w0.102: v8(28.996,42.911) 34.682,42.911 34.81,43.038 37.34,43.038 v8(37.467,43.166)
  L6_Sig3 w0.102: v2(90.211,42.977) 92.465,42.977 v2(93.138,43.649)
  L8_Bottom w0.102: v3(18.271,40.051) v4(19.525,40.051)
  other v2: 18.271,40.051 19.525,40.051
  other v3: 19.525,40.051
  other v4: 18.271,40.051
TYPEC_CC2: *.1 *.14 C139.1 D16.2 J7.B5 | length 111.8
  L1_Top w0.102: v1(8.939,37.849) J7.B5@9.441,37.849 ; v1(17.191,40.649) v3(17.191,41.037) ; v1(17.341,41.849) *.1@17.741,41.849 ; v1(37.721,24.039) C139.1@37.721,23.349 38.512,23.349 38.762,23.6 v1(38.762,23.97) 39.038,23.97 v4(39.677,23.331) ; v4(73.392,28.743) 73.884,29.235 73.884,29.883 75.109,31.107 84.91,31.107 87.961,34.159 90.218,34.159 v4(90.343,34.034) ; v1(100.441,38.399) D16.2@100.441,39.274
  L3_Sig1 w0.102: v8(60.181,26.367) 69.708,26.367 72.084,28.743 v4(73.392,28.743)
  L5_Sig2 w0.102: v2(59.906,26.268) 60.005,26.367 v8(60.181,26.367)
  L6_Sig3 w0.102: v6(48.092,24.618) 58.363,24.618 59.906,26.161 v2(59.906,26.268) ; v6(98.692,35.97) 98.692,36.65 v1(100.441,38.399)
  L6_Sig3 w0.254: v1(8.939,37.849) 8.939,37.942 9.597,38.6 15.142,38.6 v1(17.191,40.649)
  L8_Sig4 w0.102: v3(41.316,24.442) 43.753,24.442 44.017,24.706 48.004,24.706 v6(48.092,24.618) ; v3(91.531,35.893) 98.615,35.893 v6(98.692,35.97)
  L8_Sig4 w0.254: v1(17.191,40.649) 17.845,39.996 17.845,39.82 18.45,39.215 18.626,39.215 24.223,33.618 28.143,33.618 v1(37.721,24.039)
  L8_Bottom w0.102: v3(17.191,41.037) 17.341,41.187 v1(17.341,41.849) ; v4(39.677,23.331) 40.205,23.331 v3(41.316,24.442) ; v4(90.343,34.034) 91.531,35.222 v3(91.531,35.893)
  other v2: 39.677,23.331 90.343,34.034 17.191,41.037
  other v3: 39.677,23.331 90.343,34.034
  other v4: 17.191,41.037
TYPEC_DM: D18.2 J7.A7 J7.B7 R76.2 | length 122.7
  L1_Top w0.102: J7.A7@9.441,39.349 J7.A7@9.128,39.349 ; J7.B7@9.441,40.349 8.733,40.349 8.708,40.324 8.708,39.375 8.733,39.349 v1(8.841,39.349) J7.A7@9.128,39.349 ; v4(17.215,36.454) 16.641,37.028 16.562,37.028 14.962,38.628 8.862,38.628 8.821,38.67 8.821,39.029 8.927,39.135 8.927,39.149 J7.A7@9.128,39.349 ; R76.2@27.441,33.058 27.441,34.044 v1(27.593,34.196) ; v1(119.441,22.399) D18.2@119.441,23.274
  L3_Sig1 w0.102: v3(29.436,33.319) 51.384,33.319 51.671,33.031 60.087,33.031 61.105,32.013 61.596,32.013 64.436,29.172 104.621,29.172 v8(106.04,27.753)
  L5_Sig2 w0.102: v8(106.04,27.753) 114.088,27.753 v1(119.441,22.399)
  L8_Bottom w0.102: v4(17.215,36.454) 20.828,36.454 23.086,34.196 v1(27.593,34.196) 28.47,33.319 v3(29.436,33.319)
  other v2: 29.436,33.319 17.215,36.454
  other v3: 17.215,36.454
TYPEC_DP: D17.2 J7.A6 J7.B6 R75.2 | length 47.5
  L1_Top w0.102: J7.B6@9.441,38.849 10.054,38.849 10.08,38.875 10.08,39.824 10.054,39.849 ; J7.A6@9.441,39.849 10.054,39.849 ; v1(10.816,39.849) 10.054,39.849 ; v1(37.368,48.201) D17.2@40.516,51.349 v1(41.886,49.979) ; v1(48.307,49.979) 48.303,49.976 48.303,49.6 48.554,49.349 R75.2@49.441,49.349
  L3_Sig1 w0.254: v1(41.886,49.979) v1(48.307,49.979)
  L6_Sig3 w0.254: v1(10.816,39.849) 14.631,39.849 19.173,44.391 28.698,44.391 32.508,48.201 v1(37.368,48.201)
USB_B_OTG_DM: R76.1 U1.C28 | length 41.5
  L1_Top w0.102: v1(27.441,31.642) R76.1@27.441,32.349 ; v1(60.93,47.363) 60.941,47.374 U1.C28@60.941,47.549
  L6_Sig3 w0.254: v1(27.441,31.642) 30.746,31.642 39.483,40.378 46.427,40.378 48.802,42.753 49.881,42.753 49.907,42.778 49.907,43.35 49.932,43.375 50.669,43.375 51.768,44.474 52.395,44.474 53.494,45.573 57.082,45.573 57.411,45.902 57.411,45.927 57.5,46.016 57.525,46.016 59.05,47.541 ; 59.051,47.541 59.127,47.617 60.676,47.617 v1(60.93,47.363)
USB_B_OTG_DP: R75.1 U1.D28 | length 11.9
  L1_Top w0.102: R75.1@50.15,49.349 v1(54.225,49.349) ; v1(60.794,46.779) 60.941,46.927 U1.D28@60.941,46.949
  L8_Sig4 w0.254: v1(54.225,49.349) 56.44,47.134 59.508,47.134 59.864,46.779 v1(60.794,46.779)
USBCC_INTn: *.5 U1.AM20 | length 53.7
  L1_Top w0.102: v1(16.691,43.367) *.5@16.691,43.649 ; U1.AM20@64.241,35.149 64.359,35.267 v1(64.359,35.323)
  L3_Sig1 w0.254: v1(16.691,43.367) 20.697,39.362 25.662,39.362 26.082,38.943 26.082,36.379 27.854,34.606 49.402,34.606 49.653,34.857 49.967,34.857 50.059,34.765 54.149,34.765 54.508,35.124 58.862,35.124 58.885,35.148 59.656,35.148 59.677,35.127 61.923,35.127 61.948,35.152 63.52,35.152 63.548,35.124 63.744,35.124 63.754,35.114 63.929,35.114 63.939,35.124 64.16,35.124 v1(64.359,35.323)